# Altium PCB zx-ExternalROM.PcbDoc
Units mm, origin at the board's own origin, x right, y up, seen from the top; angles counter-clockwise.
Board outline 95.25 x 50.5 mm, 2 copper layers (Top Layer, Bottom Layer); 12 components, 52 nets, 128 pads, 39 vias.
Unrouted connection lines stored in the file: 3.
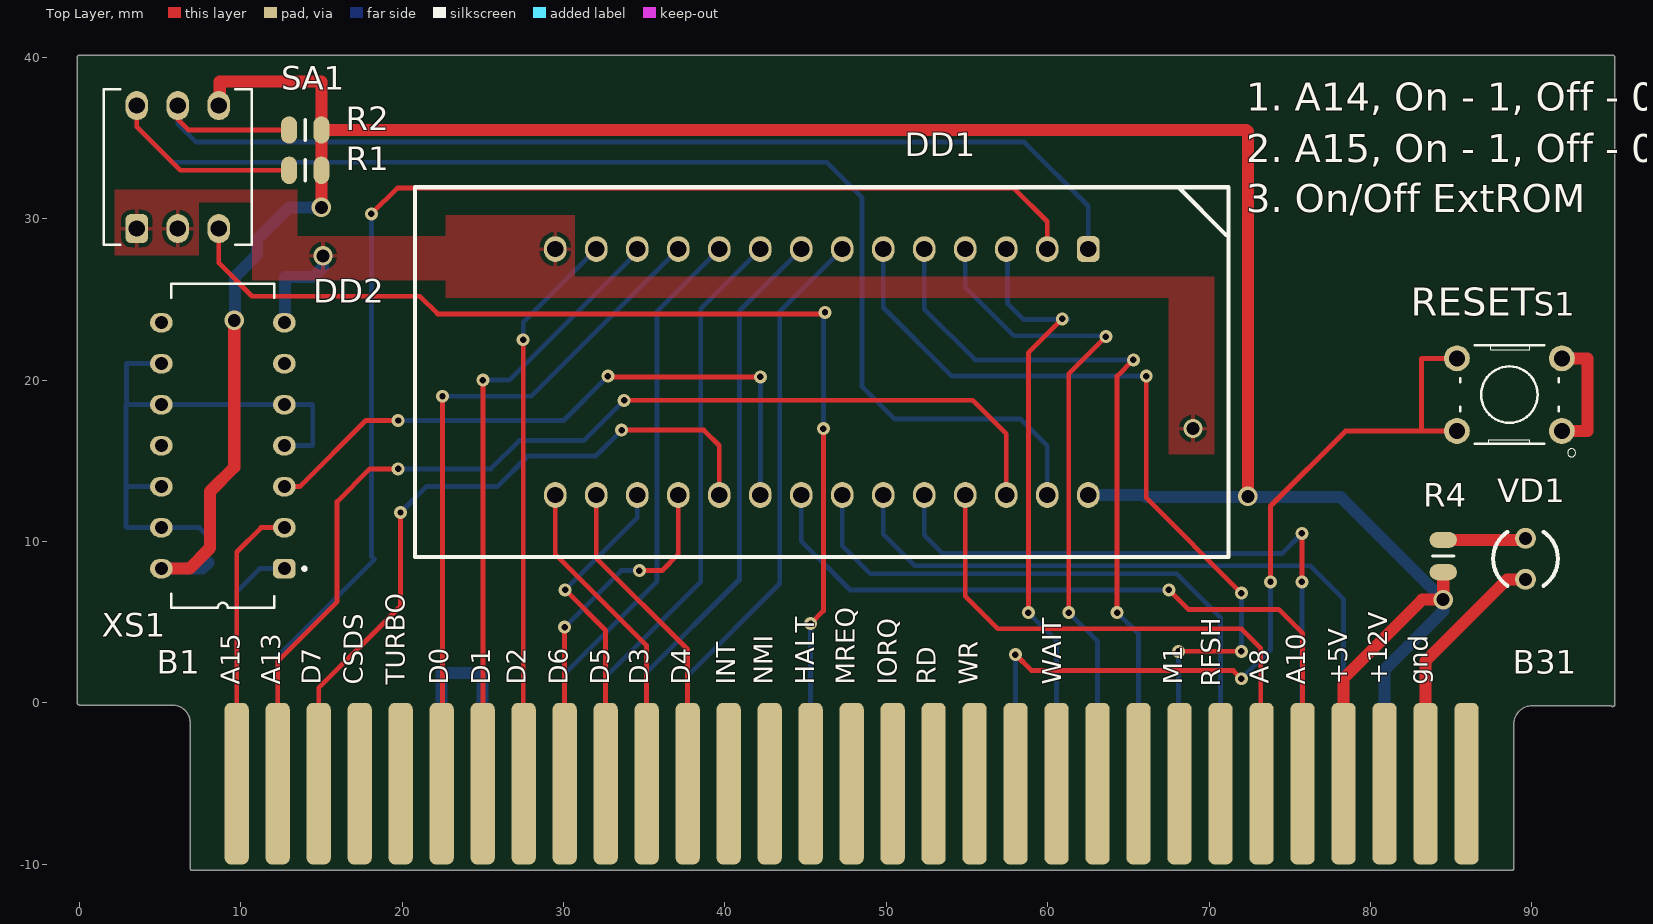
[diagram p0: Top Layer view]
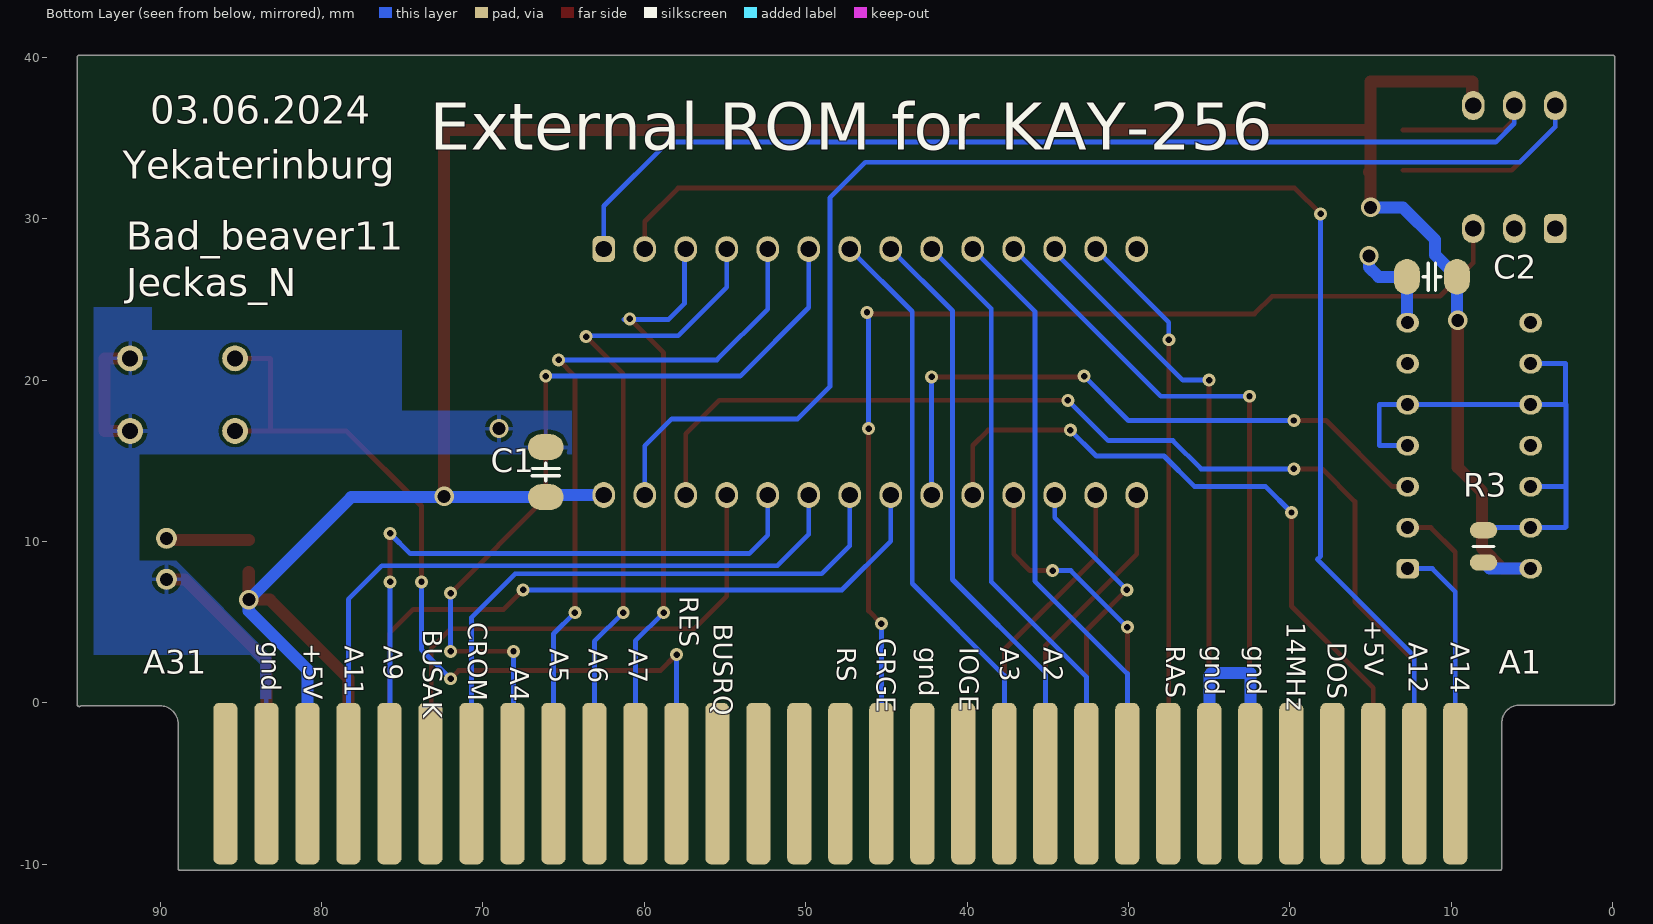
[diagram p1: Bottom Layer view, seen from below]
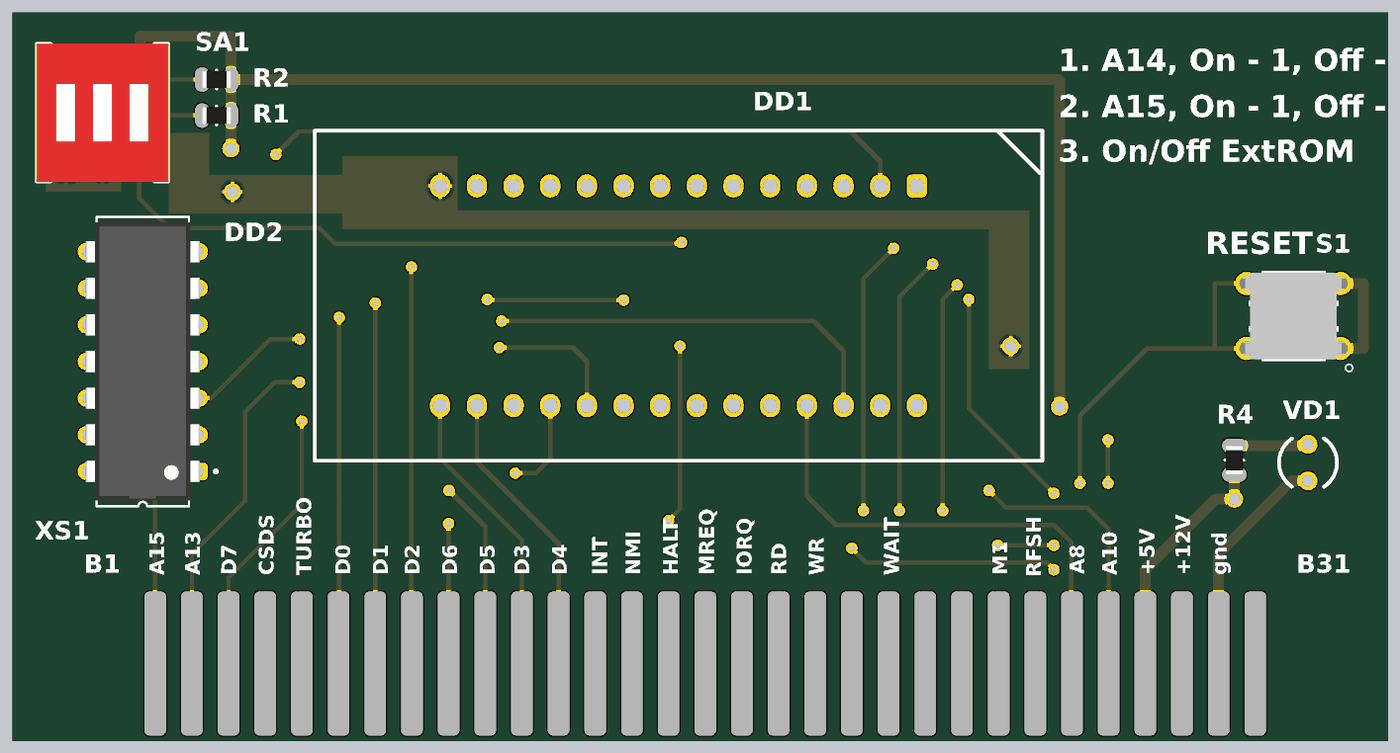
[diagram p2: 3D render of the assembled board from above, using the file's embedded part models]
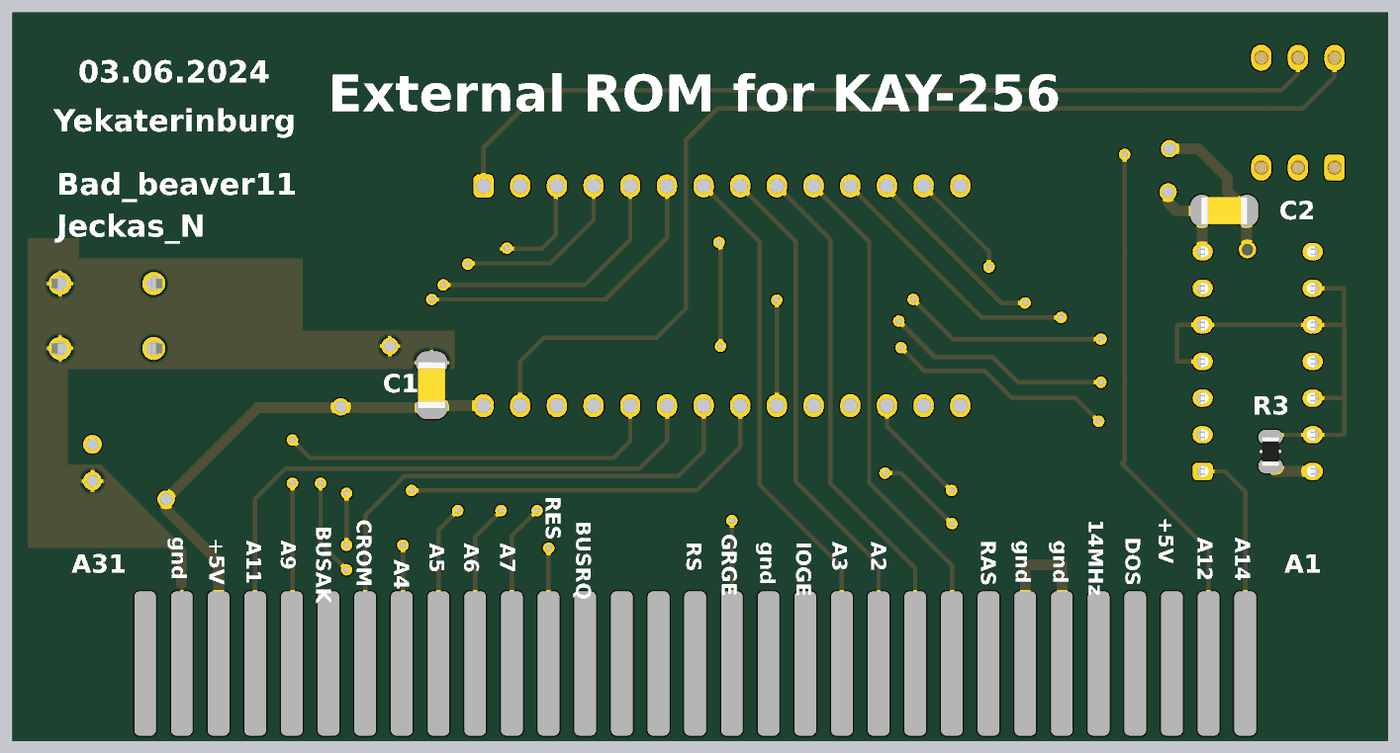
[diagram p3: 3D render of the assembled board from below, using the file's embedded part models]

## Layer stack, top to bottom
Top Solder: solder mask 0.0102, Solder Resist, Dk 3.5
Top Layer: signal copper 0.0356
Dielectric 1: dielectric 0.32, FR-4, Dk 4.8
Bottom Layer: signal copper 0.0356
Bottom Solder: solder mask 0.0102, Solder Resist, Dk 3.5

## Board outline
6.873,-10.25 6.873,-1.248 ccw(c5.75,-1.25) 5.753,-0.127 ccw(c5.75,-1.25) 5.75,-0.127 5.753,-0.127 0,-0.127 cw(c0,0) -0.127,0 -0.127,40 cw(c0,40) 0,40.127 95,40.127 cw(c95,40) 95.127,40 95.127,-0.1 cw(c95,-0.1) 94.899,-0.177 90,-0.177 ccw(c90,-1.3) 88.877,-1.296 88.877,-10.25 cw(c88.75,-10.25) 88.75,-10.377 7,-10.377 cw(c7,-10.25)

## Design rules (kind name [scope] priority, off if disabled: settings)
Clearance [All] p1: gap=0.2 ignorepadtopadclearanceinfootprint=FALSE
PolygonConnect [All] p1: connectstyle=Relief reliefconductorwidth=0.254 reliefentries=4 polygonreliefangle="90 Angle" airgapwidth=0.254
RoutingVias [All] p1: holewidth=0.8 width=0.4 viastyle="Through Hole" minholewidth=0.4 minwidth=0.2 maxholewidth=2.6 maxwidth=2
SolderMaskExpansion [All] p1: expansion=0.102
Width [All] p1: maxlimit=2 minlimit=0.2 preferedwidth=0.75
30 further rules are at their usual default settings.

## Components (designator, comment, footprint, x,y, rotation, side; value= is the part's Value field where it differs from the comment)
C1 "1 мкФ" "CAP C 3216 (1206) 1.9h" 66.1,14.3 r90 bottom
C2 "1 мкФ" "CAP C 3216 (1206) 1.9h" 11.2,26.4 r0 bottom
DD1 "W27C512" ZIF-28 46,20.5 r180 top
DD2 "КР1533ЛЛ1" DIP14 8.89,15.94 r180 top
R1 "10 кОм" "RES C 2012 (0805) 0.65h" 14,33 r180 top
R2 "10 кОм" "RES C 2012 (0805) 0.65h" 14,35.5 r180 top
R3 "10 кОм" "RES C 2012 (0805) 0.65h" 8,9.7 r90 bottom
R4 "150 Ом" "RES C 2012 (0805) 0.65h" 84.5,9.1 r270 top
S1 "B3F-1000" SW_B3F-1000 88.6,19.1 r180 top
SA1 "KLS7-DST-03-R-00" KLS7-DST-03-R-00 6.1,33.2 r0 top
VD1 "LED" "LED 3mm" 89.6,7.66 r90 top
XS1 "KLS1-603C-62S" "KLS1-603 ISA" 47.85,-5 r0 top

## Footprints (in the part's own frame and the unit in brackets; to place one, negate y for a bottom-side part, rotate by r counter-clockwise, add the part's x,y. Pads: shape width x height; smd on the part's side, far side on the other; paste and mask are expansions set on the pad)
"CAP C 3216 (1206) 1.9h" [mm] "Chip Capacitor, non-polarized, 3.2x1.6mm"
  oval 1.6x2.2 smd: 1(-1.55,0) 2(1.55,0)
  silkscreen extent -0.55,-0.85 0.55,0.85, body extent -1.6,-0.95 1.6,0.95, height 1.59
DIP14 [mm]
  rrect50% 1.4x1.2 hole 0.8: 1(-3.81,7.62)
  oval 1.4x1.2 hole 0.8: 2(-3.81,5.08) 3(-3.81,2.54) 4(-3.81,0) 5(-3.81,-2.54) 6(-3.81,-5.08) 7(-3.81,-7.62) 8(3.81,-7.62) 9(3.81,-5.08) 10(3.81,-2.54) 11(3.81,0) 12(3.81,2.54) 13(3.81,5.08) 14(3.81,7.62)
  silkscreen extent -5.15,-10.03 3.2,10.03, body extent -3.96,-9.65 3.96,9.65, height 5.59
"KLS1-603 ISA" [mm]
  rrect50% 1.5x10 smd far side: A1(-38.1,0) A2(-35.56,0) A3(-33.02,0) A4(-30.48,0) A5(-27.94,0) A6(-25.4,0) A7(-22.86,0) A8(-20.32,0) A9(-17.78,0) A10(-15.24,0) A11(-12.7,0) A12(-10.16,0) A13(-7.62,0) A14(-5.08,0) A15(-2.54,0) A16(0,0) A17(2.54,0) A18(5.08,0) A19(7.62,0) A20(10.16,0) A21(12.7,0) A22(15.24,0) A23(17.78,0) A24(20.32,0) A25(22.86,0) A26(25.4,0) A27(27.94,0) A28(30.48,0) A29(33.02,0) A30(35.56,0) A31(38.1,0)
  rrect50% 1.5x10 smd: B1(-38.1,0) B2(-35.56,0) B3(-33.02,0) B4(-30.48,0) B5(-27.94,0) B6(-25.4,0) B7(-22.86,0) B8(-20.32,0) B9(-17.78,0) B10(-15.24,0) B11(-12.7,0) B12(-10.16,0) B13(-7.62,0) B14(-5.08,0) B15(-2.54,0) B16(0,0) B17(2.54,0) B18(5.08,0) B19(7.62,0) B20(10.16,0) B21(12.7,0) B22(15.24,0) B23(17.78,0) B24(20.32,0) B25(22.86,0) B26(25.4,0) B27(27.94,0) B28(30.48,0) B29(33.02,0) B30(35.56,0) B31(38.1,0)
KLS7-DST-03-R-00 [mm]
  rrect50% 1.4x1.8 hole 1: 1(-2.54,-3.81)
  oval 1.4x1.8 hole 1: 2(-2.54,3.81) 3(0,-3.81) 4(0,3.81) 5(2.54,-3.81) 6(2.54,3.81)
  silkscreen extent -4.59,-4.81 4.59,4.81, body extent -4.59,-4.8 4.59,4.8, height 6.85
"LED 3mm" [mm]
  round 1.3 hole 0.8: 1(0,0) 2(2.54,0)
  silkscreen extent -0.4,-2.01 2.94,2.01
"RES C 2012 (0805) 0.65h" [mm] "Chip Resistor, Body 2.0x1.3mm, 0.125 Watt"
  oval 1x1.7 smd: 1(-1,0) 2(1,0)
  silkscreen extent 0,-0.65 0,0.65, body extent -1,-0.6 1,0.6, height 0.6
SW_B3F-1000 [mm]
  round 1.6 hole 1: 1(-3.25,2.25) 2(3.25,2.25) 3(-3.25,-2.25) 4(3.25,-2.25)
  silkscreen extent -4.1,-3.05 3.05,3.85, body extent -3.85,-3 3.85,3, height 4.3
ZIF-28 [mm]
  rrect50% 1.4x1.6 hole 1: 1(-16.51,-7.62)
  oval 1.4x1.6 hole 1: 2(-13.97,-7.62) 3(-11.43,-7.62) 4(-8.89,-7.62) 5(-6.35,-7.62) 6(-3.81,-7.62) 7(-1.27,-7.62) 8(1.27,-7.62) 9(3.81,-7.62) 10(6.35,-7.62) 11(8.89,-7.62) 12(11.43,-7.62) 13(13.97,-7.62) 14(16.51,-7.62) 15(16.51,7.62) 16(13.97,7.62) 17(11.43,7.62) 18(8.89,7.62) 19(6.35,7.62) 20(3.81,7.62) 21(1.27,7.62) 22(-1.27,7.62) 23(-3.81,7.62) 24(-6.35,7.62) 25(-8.89,7.62) 26(-11.43,7.62) 27(-13.97,7.62) 28(-16.51,7.62)
  silkscreen extent -25.2,-11.45 25.2,11.45

## Part data
C1 C2: library part "ЧИП-1206-X5R-1 мкФ 50В ±10%", "Конденсатор не полярный", AltValue=1, Dielectric=X5R, Manufacturer=Yageo, Part Number=CC1206KKX5R9BB105, Standard sizes of packages="3216 (1206)", Tolerance=±10%, Voltage=50, FullName="ЧИП-1206-X5R-1 мкФ 50В ±10%", Name=ЧИП-1206, Nominal=1000000, Note="Конденсатор типоразмер 3216 (1206), general purpose", Units=мкФ
R1 R2 R3: library part "ЧИП-0805-10 кОм ±5%", "Резистор 0.125 Вт", AltValue=10, Manufacturer=Yageo, Part Number=RC0805JR-0710KL, Power="1/8W (0.125W)", Standard sizes of packages="2012 (0805)", Tolerance=±5%, FullName="ЧИП-0805-10 кОм ±5%", Name=ЧИП-0805, Nominal=10000, Note="Резистор постоянный, 0805", Units=кОм
R4: library part "ЧИП-0805-150 Ом ±5%", "Резистор 0.125 Вт", AltValue=150, Manufacturer=Yageo, Part Number=RC0805JR-07150RL, Power="1/8W (0.125W)", Standard sizes of packages="2012 (0805)", Tolerance=±5%, FullName="ЧИП-0805-150 Ом ±5%", Name=ЧИП-0805, Nominal=150, Note="Резистор постоянный, 0805", Units=Ом
SA1: "Переключатель 3-х позиционный"
XS1: library part KLS1-603C-64S
S1: ChipDip PN=8001787102, Platan PN=2011347247

## Via types
v1: diameter 0.8, hole 0.4, Top Layer to Bottom Layer, 33 vias
v2: diameter 1.2, hole 0.8, Top Layer to Bottom Layer, 6 vias

## Nets (pads, with @x,y where several pads share a name; then routed paths per layer and width w, separated by ;. In a path a pad name is that pad's centre, name@x,y a point inside that pad or via, vN(x,y) a via of type N, cw(c..) or ccw(c..) an arc to the next point about the centre after c; other vN are vias at no path point)
5V: C1.1 C2.1 DD1.28 DD2.14 R1.1 R2.1 R3.1 R4.2 SA1.6 XS1.A3 XS1.A29 XS1.B28 | length 181.5
  Top Layer w0.75: DD2.14 6.82,8.32 8.1,9.6 8.1,13.1 9.6,14.6 v2(9.6,23.7) ; SA1.6 8.7,37.07 8.7,38.5 15,38.5 R2.1 ; v2(15,30.7) 15,32.8 15.1,32.9 R1.1 R2.1 ; v2(72.4,12.8) 72.4,35.4 72.3,35.5 R2.1 ; XS1.B28 78.33,1.53 83.2,6.4 v2(84.5,6.4) R4.2
  Bottom Layer w0.75: DD2.14 7.62,8.32 R3.1 ; v2(9.6,23.7) 9.65,23.75 C2.1 11,27.75 11,28.7 13,30.7 v2(15,30.7) ; DD1.28 65.97,12.88 C1.1 78.15,12.75 v2(84.5,6.4) 84.5,5.7 80.87,2.07 XS1.A29
"14 MHz": XS1.A5
A0: DD1.10 XS1.A9 | length 37.1
  Bottom Layer w0.3: XS1.A9 30.07,1.82 35.8,7.55 35.8,24.27 DD1.10
A1: DD1.9 XS1.A10 | length 37.1
  Bottom Layer w0.3: XS1.A10 32.61,1.61 38.5,7.5 38.5,24.43 DD1.9
A2: DD1.8 XS1.A11 | length 37.1
  Bottom Layer w0.3: XS1.A11 35.15,1.9 40.9,7.65 40.9,24.29 DD1.8
A3: DD1.7 XS1.A12 | length 37.1
  Bottom Layer w0.3: XS1.A12 37.69,1.69 43.4,7.4 43.4,24.25 DD1.7
A4: DD1.6 XS1.A24 | length 53.3
  Top Layer w0.3: v1(66.1,20.25) 66.1,12.7 v1(72,6.8) ; v1(68.1,3.2) v1(72,3.2)
  Bottom Layer w0.3: DD1.6 49.81,24.5 54.06,20.25 v1(66.1,20.25) ; v1(68.1,3.2) 68.1,-4.93 XS1.A24 XS1.A24@68.2,-4.97 ; v1(72,3.2) v1(72,6.8)
A5: DD1.5 XS1.A23 | length 45.5
  Top Layer w0.3: v1(64.3,5.6) 64.3,20.25 v1(65.3,21.25)
  Bottom Layer w0.3: DD1.5 52.35,24.4 55.5,21.25 v1(65.3,21.25) v1@65.5,21.25 ; v1(64.3,5.6) 65.63,4.27 XS1.A23 XS1.A23@65.7,-4.93
A6: DD1.4 XS1.A22 | length 42
  Top Layer w0.3: v1@61.3,5.5 v1(61.3,5.6) 61.3,20.4 v1(63.6,22.7)
  Bottom Layer w0.3: DD1.4 54.89,25.75 57.89,22.75 v1@63.75,22.75 ; v1(61.3,5.6) 63.09,3.81 XS1.A22 XS1.A22@63.1,-4.99
A7: DD1.3 XS1.A21 | length 38
  Top Layer w0.3: v1(58.8,5.6) 58.8,21.7 v1(60.9,23.8)
  Bottom Layer w0.3: DD1.3 57.5,28.05 57.5,24.75 58.5,23.75 v1@61.25,23.75 ; v1(58.8,5.6) 60.55,3.85 XS1.A21 XS1.A21@60.5,-4.95
A8: DD1.25 XS1.B26 | length 34.3
  Top Layer w0.3: DD1.25 54.89,6.61 56.9,4.6 72,4.6 73.2,3.4 73.2,-4.95 XS1.B26
A9: DD1.24 XS1.A27 | length 42.4
  Top Layer w0.3: v1(75.75,7.5) v1(75.75,10.5)
  Bottom Layer w0.3: DD1.24 52.35,10.4 53.5,9.25 74.5,9.25 v1(75.75,10.5) ; v1(75.75,7.5) 75.75,-4.96 XS1.A27
A10: DD1.21 XS1.B27 | length 45.6
  Top Layer w0.3: v1(67.5,7) 68.7,5.8 74.3,5.8 75.79,4.31 XS1.B27
  Bottom Layer w0.3: DD1.21 44.73,10.02 47.75,7 v1(67.5,7)
A11: DD1.23 XS1.A28 | length 44
  Bottom Layer w0.3: DD1.23 49.81,10.44 51.75,8.5 76.25,8.5 78.33,6.42 XS1.A28
A12: DD1.2 XS1.A2 | length 83
  Top Layer w0.3: v1(18.1,30.3) 19.7,31.9 57.9,31.9 59.97,29.83 DD1.2
  Bottom Layer w0.3: XS1.A2 12.29,2.89 18.3,8.9 18.1,9.1 v1(18.1,30.3)
A13: DD1.26 XS1.B2 | length 67.7
  Top Layer w0.3: XS1.B2 12.29,2.59 15.975,6.275 15.975,12.475 18,14.5 v1(19.75,14.5) ; v1(33.75,18.75) 55.35,18.75 57.43,16.67 DD1.26
  Bottom Layer w0.3: v1(19.75,14.5) 25.5,14.5 27.25,16.25 31.25,16.25 v1(33.75,18.75)
A14: DD2.1 XS1.A1 | length 15.4
  Bottom Layer w0.3: XS1.A1 9.75,6.9 11.17,8.32 DD2.1
A15: DD2.2 XS1.B1 | length 17.9
  Top Layer w0.3: XS1.B1 9.75,9.35 11.26,10.86 DD2.2
B\U\S\A\K\: XS1.A26
B\U\S\R\Q\: XS1.A19
C\S\D\S\: XS1.B4
C\S\R\O\M\: DD1.22 XS1.A25 | length 38.7
  Bottom Layer w0.3: DD1.22 47.27,9.73 49,8 68,8 70.71,5.29 XS1.A25
D0: DD1.11 XS1.B6 | length 42.4
  Top Layer w0.3: XS1.B6 22.5,-4.95 v1(22.5,19)
  Bottom Layer w0.3: v1(22.5,19) 27.99,19 DD1.11
D1: DD1.12 XS1.B7 | length 38
  Top Layer w0.3: XS1.B7 25,-4.99 v1(25,20)
  Bottom Layer w0.3: v1(25,20) 26.641,20 34.57,27.929 DD1.12
D2: DD1.13 XS1.B8 | length 35.1
  Top Layer w0.3: v1(27.5,22.5) 27.5,-4.81 27.58,-4.89 27.5,-4.97 XS1.B8
  Bottom Layer w0.3: v1(27.5,22.5) 27.5,23.59 DD1.13
D3: DD1.15 XS1.B11 | length 20.2
  Top Layer w0.3: DD1.15 29.49,9.21 35.15,3.55 XS1.B11
D4: DD1.16 XS1.B12 | length 20.2
  Top Layer w0.3: DD1.16 32.03,8.97 37.69,3.31 XS1.B12
D5: DD1.17 XS1.B10 | length 20.9
  Top Layer w0.3: v1@30,7 v1(30.1,7) 32.61,4.49 XS1.B10
  Bottom Layer w0.3: v1(30.1,7) 34.57,11.47 DD1.17
D6: DD1.18 XS1.B9 | length 22.4
  Top Layer w0.3: XS1.B9 v1(30.07,4.7) v1@30.07,4.83 ; v1(34.7,8.2) 36.1,8.2 37.11,9.21 DD1.18
  Bottom Layer w0.3: v1(30.07,4.7) 33.57,8.2 v1(34.7,8.2)
D7: DD1.19 XS1.B3 | length 44.2
  Top Layer w0.3: XS1.B3 14.83,0.93 19.9,6 v1(19.9,11.8) ; v1(33.6,16.9) 38.7,16.9 39.65,15.95 DD1.19
  Bottom Layer w0.3: v1(19.9,11.8) 21.5,13.4 25.9,13.4 27.8,15.3 32,15.3 v1(33.6,16.9)
D\O\S\: XS1.A4
gnd: C1.2 C2.2 DD1.14 DD2.7 S1.1 S1.3 SA1.1 SA1.3 VD1.1 XS1.A6 XS1.A7 XS1.A14 XS1.A30 XS1.B30 | length 45.9
  Top Layer w0.75: XS1.B30 83.41,2.61 88.46,7.66 VD1.1 ; S1.1 93.45,16.85 93.45,21.35 S1.3
  Bottom Layer w0.75: DD2.7 12.75,23.61 C2.2 14.5,26.4 15.1,27 v2(15.1,27.7) ; XS1.A6 22.45,1.85 24.85,1.85 24.99,1.71 XS1.A7
  other v2: 69,17
H\A\L\T\: XS1.B15
I\N\T\: XS1.B13
I\O\R\Q\: XS1.B17
I\O\R\Q\C\E\: XS1.A13
M\1\: XS1.B24
M\R\E\Q\: XS1.B16
N\M\I\: XS1.B14
NetDD1_1: DD1.1 R2.2 SA1.4 | length 70.3
  Top Layer w0.3: SA1.4 6.1,36.15 6.75,35.5 R2.2
  Bottom Layer w0.3: SA1.4 6.1,35.9 7.25,34.75 58.55,34.75 62.51,30.79 DD1.1
NetDD1_20: DD1.20 DD2.3 | length 39.7
  Top Layer w0.3: DD2.3 13.65,13.4 17.75,17.5 v1(19.75,17.5) ; v1(32.75,20.25) 32.8,20.2 v1(42.2,20.2)
  Bottom Layer w0.3: v1(19.75,17.5) 30,17.5 v1(32.75,20.25) ; DD1.20 42.2,12.89 v1(42.2,20.2)
NetDD1_27: DD1.27 R1.2 SA1.2 | length 87.7
  Top Layer w0.3: SA1.2 3.56,35.69 6.25,33 R1.2
  Bottom Layer w0.3: SA1.2 3.56,35.69 5.75,33.5 46.3,33.5 48.5,31.3 48.5,19.6 50.5,17.6 58.3,17.6 59.97,15.93 DD1.27
NetDD2_4: DD2.4 DD2.5 DD2.9 DD2.10 DD2.12 DD2.13 R3.2 | length 35.5
  Bottom Layer w0.3: DD2.12 2.9,13.4 ; DD2.9 2.92,21.02 2.92,18.52 ; R3.2@7.9,10.4 7.44,10.86 DD2.13 2.94,10.86 2.9,10.9 2.9,13.4 ; DD2.4 14.46,15.94 14.46,18.46 14.44,18.48 DD2.5 DD2.10 2.96,18.48 2.92,18.52 ; 2.9,13.4 2.9,18.5 2.92,18.52
NetR4_1: R4.1 VD1.2 | length 5.1
  Top Layer w0.75: R4.1 89.5,10.1 VD1.2
R\D\: XS1.B18
R\D\R\: SA1.5 XS1.A15 | length 71
  Top Layer w0.3: SA1.5 8.64,27.26 10.7,25.2 21.1,25.2 22.2,24.1 46.1,24.1 v1(46.2,24.2) ; v1(45.31,4.91) 46.1,5.7 v1(46.1,17)
  Bottom Layer w0.3: XS1.A15 v1(45.31,4.91) ; v1(46.1,17) 46.1,24.4 46.2,24.3 v1(46.2,24.2)
R\E\S\: S1.2 S1.4 XS1.A20 | length 54.3
  Top Layer w0.3: v1(58,3) 59,2 71.5,2 v1(72,1.5) ; v1(73.8,7.5) 73.8,12.2 78.45,16.85 83.1,16.85 ; S1.2 83.1,16.85 ; S1.4 83.15,21.35 83.15,16.9 83.1,16.85
  Bottom Layer w0.3: v1(58,3) 58.01,2.99 XS1.A20 ; v1(72,1.5) 73.8,3.3 v1(73.8,7.5)
R\F\S\H\: XS1.B25
RS: XS1.A16
TURBO: XS1.B5
W\A\I\T\: XS1.B21
W\R\: XS1.B19
pads on no net: DD2.6 DD2.8 DD2.11 XS1.A8 XS1.A17 XS1.A18 XS1.A31 XS1.B20 XS1.B22 XS1.B23 XS1.B29 XS1.B31

## Polygon pours and split planes (outlines as drawn)
gnd on Bottom Layer "gm" (solid, pour order 0): 83.1,-4.1 83.1,2.9 89,8.8 91.3,8.8 91.3,15.4 64.5,15.4 64.5,18.1 75.03,18.1 75.03,23.1 90.518,23.1 90.518,24.5 94.1,24.5 94.1,3 84.4,3 83.8,2.4 83.8,-4.1
gnd on Top Layer "gm" (solid, pour order 2): 22.7,30.2 30.7,30.2 30.7,26.4 70.3,26.4 70.3,15.4 67.5,15.4 67.5,25.1 22.7,25.1 22.7,26.2 10.7,26.2 10.7,31.028 7.4,31.028 7.4,27.728 2.2,27.728 2.2,31.8 13.5,31.8 13.5,28.9 22.7,28.9

## Silkscreen, mask and mechanical layers (free items; w line width, h text height)
Top Overlay:
  lines w0.254: 68.1,31.95 71.05,29
  text "1. A14, On - 1, Off - 0" at 72.3,36.1 h3
  text "2. A15, On - 1, Off - 0" at 72.3,32.9 h3
  text "3. On/Off ExtROM" at 72.3,29.8 h3
  text "RESET" at 82.5,23.4 h3
  text "B1" at 4.8,1.3 h2.5
  text "B31" at 88.8,1.3 h2.5
  text "A8" at 74.1,1.2 h2 r90
  text "A15" at 10.35,1.13 h2 r90
  text "A13" at 12.85,1.13 h2 r90
  text "D7" at 15.35,1.13 h2 r90
  text "CSDS" at 17.95,1.13 h2 r90
  text "TURBO" at 20.55,1.13 h2 r90
  text "D0" at 23.25,1.13 h2 r90
  text "D1" at 25.85,1.13 h2 r90
  text "D2" at 28.05,1.13 h2 r90
  text "D6" at 30.65,1.13 h2 r90
  text "D5" at 33.25,1.13 h2 r90
  text "D3" at 35.65,1.13 h2 r90
  text "D4" at 38.25,1.13 h2 r90
  text "INT" at 41.05,1.13 h2 r90
  text "NMI" at 43.35,1.13 h2 r90
  text "HALT" at 45.95,1.13 h2 r90
  text "MREQ" at 48.45,1.13 h2 r90
  text "IORQ" at 51.05,1.13 h2 r90
  text "RD" at 53.45,1.13 h2 r90
  text "WR" at 56.05,1.121 h2 r90
  text "WAIT" at 61.25,1.121 h2 r90
  text "M1" at 68.75,1.13 h2 r90
  text "A10" at 76.35,1.13 h2 r90
  text "+5V" at 78.95,1.13 h2 r90
  text "+12V" at 81.45,1.13 h2 r90
  text "gnd" at 83.95,1.13 h2 r90
  text "RFSH" at 71.1,1 h2 r90
Bottom Overlay:
  text "03.06.2024" at 90.6,35.3 h3
  text "External ROM for KAY-256" at 73.3,33.3 h5
  text "Yekaterinburg" at 92.3,31.9 h3
  text "Bad_beaver11" at 92.1,27.5 h3
  text "Jeckas_N" at 92.1,24.6 h3
  text "RES" at 58.2,6.6 h2 r90
  text "+5V" at 15.75,5.15 h2 r90
  text "14MHz" at 20.6,5 h2 r90
  text "CROM" at 71.3,5 h2 r90
  text "BUSRQ" at 56.1,4.9 h2 r90
  text "BUSAK" at 74.1,4.55 h2 r90
  text "GRGE" at 46,4 h2 r90
  text "gnd" at 84.1,3.8 h2 r90
  text "A14" at 10.45,3.75 h2 r90
  text "A12" at 13.05,3.75 h2 r90
  text "DOS" at 18.05,3.75 h2 r90
  text "+5V" at 81.5,3.7 h2 r90
  text "gnd" at 23.05,3.55 h2 r90
  text "gnd" at 25.65,3.55 h2 r90
  text "RAS" at 28.05,3.55 h2 r90
  text "A9" at 76.55,3.55 h2 r90
  text "A11" at 78.95,3.55 h2 r90
  text "A2" at 35.65,3.45 h2 r90
  text "A3" at 38.35,3.45 h2 r90
  text "IOGE" at 40.85,3.45 h2 r90
  text "gnd" at 43.35,3.45 h2 r90
  text "RS" at 48.45,3.45 h2 r90
  text "A7" at 61.35,3.35 h2 r90
  text "A6" at 63.85,3.35 h2 r90
  text "A5" at 66.25,3.35 h2 r90
  text "A4" at 68.7,2.2 h2 r90
  text "A1" at 7.05,1.3 h2.5
  text "A31" at 91.05,1.3 h2.5
Mechanical 1:
  lines w0.254: 5.75,0 cw(c5.75,-1.25) 7,-1.25 ; 5.9,0 0,0 0,40 95,40 95,-0.1 ; 88.75,-1.3 cw(c90,-1.3) 90,-0.05 95,-0.05 ; 88.75,-1.25 88.75,-10.25 7,-10.25 7,-1 ; 7,-1 7,-1